# EAGLE board mLRS-tx-dualE28-base-v031-np (EAGLE 7.5.0)
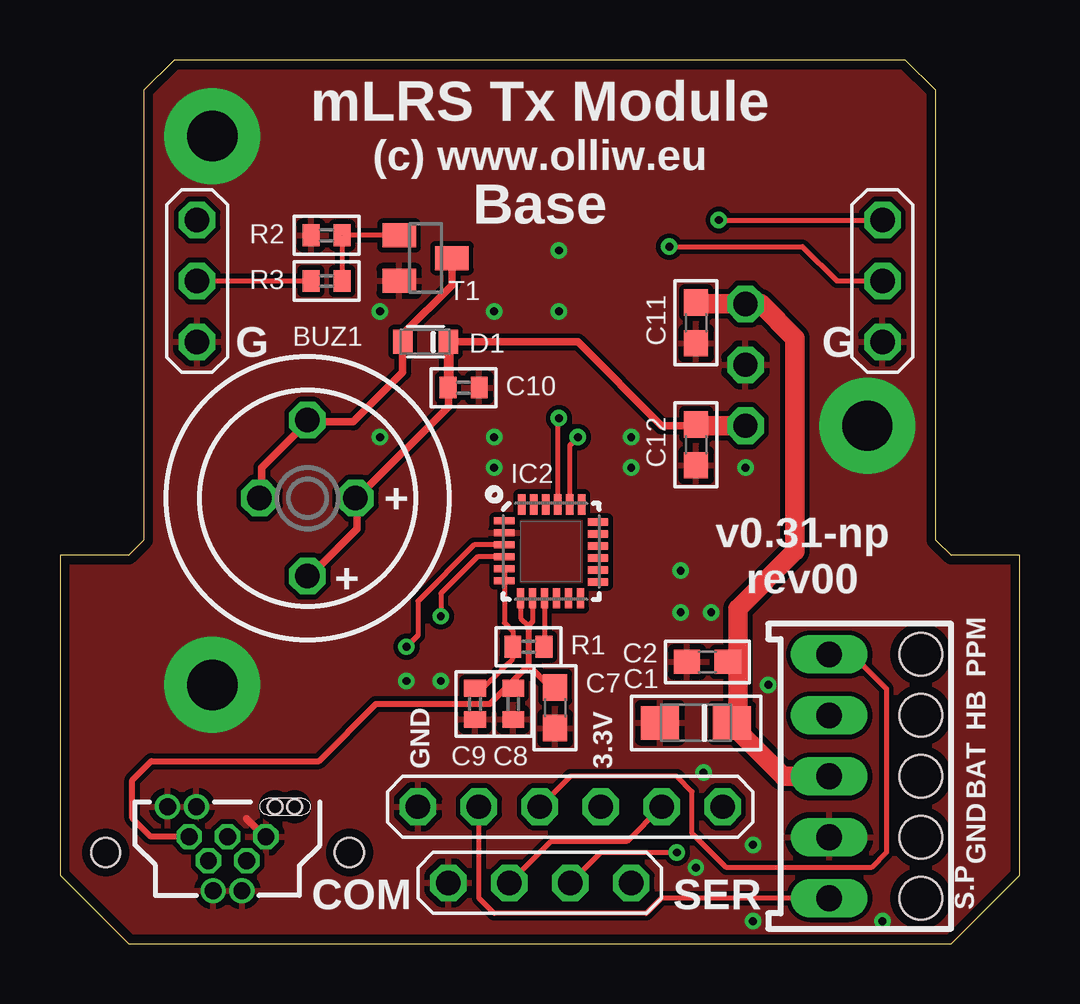
[diagram p0: board, top side]
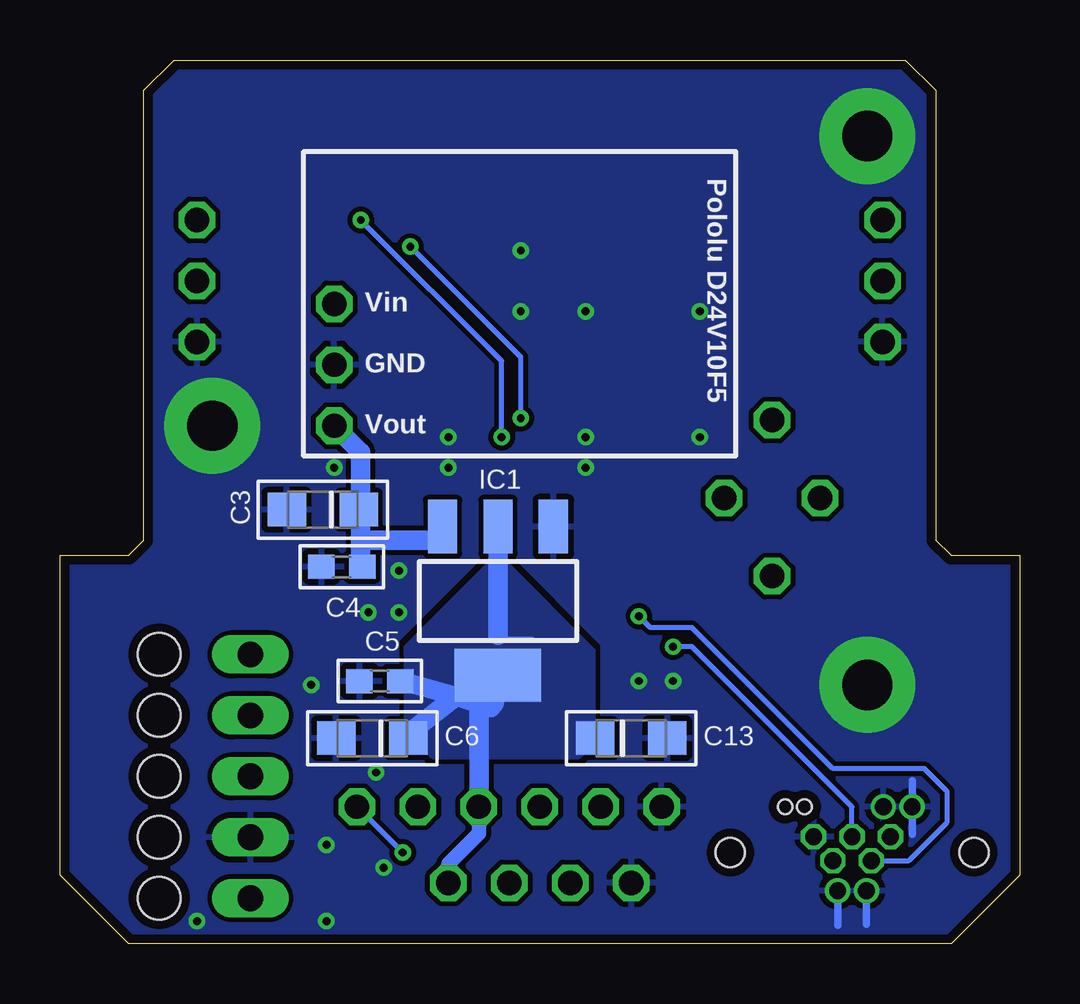
[diagram p1: board, bottom side, seen from below]

Size 40.01 x 36.83 mm. Coordinates in mm from the lower left corner, seen from the top.
Outline: 2.86,0 37.15,0 40.01,2.86 40.01,16.19 37.15,16.19 36.51,16.83 36.51,35.56 35.24,36.83 4.76,36.83 3.49,35.56 3.49,16.83 2.86,16.19 0,16.19 0,2.86 2.86,0
Copper layers (1*16): Top 0.0356mm / dielectric 1.5011mm / Bottom 0.0356mm
Design rules "ow-oshpark-2layer": minimum track width 6mil, minimum drill 13mil, track to track 6mil, track to pad 6mil, pad to pad 6mil, via to via 6mil, smd to smd 6mil, copper to edge 15mil, drill to drill 6mil, minimum pad ring 7mil, minimum via ring 7mil, stop-mask expansion 2.5mil, vias tented up to drill 26mil, thermal gap 10mil
Holes 0.6 mm at 8.97,5.71 9.78,5.71
Holes 1.2 mm at 1.91,3.81 12.06,3.81

## Footprints (pad centres in the part's own frame; a part is rotated, then mirrored left to right if it is on the bottom)
BUZZER-12MM = drill 1.016 octagon: + 3.25,0; - -3.25,0
BUZZER-9MM = drill 1.016 octagon: + 2,0; - -2,0
SMC_A = smd 1.6 x 1.4: + -1.5,0; - 1.5,0
C0603 = smd 1.1 x 1: 1 -0.85,0; 2 0.85,0
C0402 = smd 0.7 x 0.9: 1 -0.65,0; 2 0.65,0
SOD110-R = smd 0.8 x 1: A 0.95,0; C -0.95,0
SOT223 = smd 1.219 x 2.235: 1 -2.311,-3.099; 2 0,-3.099; 3 2.311,-3.099 | smd 3.6 x 2.2: 4 0,3.099
QFN24-CP2102N = smd 0.85 x 0.3: 1 -1.95,1.275; 2 -1.95,0.775; 3 -1.95,0.275; 4 -1.95,-0.225; 5 -1.95,-0.725; 6 -1.95,-1.225; 13 1.95,-1.275; 14 1.95,-0.775; 15 1.95,-0.275; 16 1.95,0.225; 17 1.95,0.725; 18 1.95,1.225 | smd 0.3 x 0.85: 7 -1.275,-1.95; 8 -0.775,-1.95; 9 -0.275,-1.95; 10 0.225,-1.95; 11 0.725,-1.95; 12 1.225,-1.95; 19 1.275,1.95; 20 0.775,1.95; 21 0.275,1.95; 22 -0.225,1.95; 23 -0.725,1.95; 24 -1.225,1.95
4455-B05 = drill 1.067 long: 1 -5.08,0; 2 -2.54,0; 3 0,0; 4 2.54,0; 5 5.08,0 | hole 1.778: -5.08,3.81; -2.54,3.81; 0,3.81; 2.54,3.81; 5.08,3.81
PINHEAD_6X1 = drill 1.016 octagon: 1 0,12.7; 2 0,10.16; 3 0,7.62; 4 0,5.08; 5 0,2.54; 6 0,0
PINHEAD_3X1 = drill 1.016 octagon: 1 0,0; 2 0,-2.54; 3 0,-5.08
PINHEAD_4X1 = drill 1.016 octagon: 1 0,7.62; 2 0,5.08; 3 0,2.54; 4 0,0
PINHEAD_3X1_WO = drill 1.016 octagon: 1 0,0; 2 0,-2.54; 3 0,-5.08
R0402 = smd 0.7 x 0.9: 1 -0.65,0; 2 0.65,0
SOT23 = smd 1 x 1.4: 1 -0.95,-1.1; 2 0.95,-1.1; 3 0,1.1
USB-MICROB-UP-NONPLATED = drill 0.7 pad 1: CASE$1 1.75,0.6; CASE$2 1.75,-0.6; CASE$3 -1.75,-1.3; CASE$4 -1.75,-2.5 | drill 0.7 pad 1 octagon: D+ -0.5,0; D- 0.5,-0.8; GND -0.5,1.6; ID 0.5,0.8; VBUS -0.5,-1.6

## Placement (x,y rotation side)
BUZ1  BUZZER-12MM  [BUZZER-12MM]  10.32,18.57 270 top
BUZ2  BUZZER-9MM-9MM  [BUZZER-9MM]  10.32,18.57 0 top
C1  10u  [SMC_A]  26.51,9.21 180 top
C2  100n  [C0603]  26.99,11.75 180 top
C3  10u  [SMC_A]  29.05,18.1 180 bottom
C4  100n  [C0603]  28.26,15.72 180 bottom
C5  100n  [C0603]  26.67,10.95 180 bottom
C6  10u  [SMC_A]  26.99,8.57 180 bottom
C7  4.7u  [C0603]  20.64,9.84 270 top
C8  100n  [C0402]  18.89,10 270 top
C9  100n  [C0402]  17.3,10 270 top
C10  100n  [C0402]  16.83,23.18 0 top
C11  100n  [C0603]  26.51,25.88 270 top
C12  100n  [C0603]  26.51,20.8 270 top
C13  10u  [SMC_A]  16.19,8.57 0 bottom
D1  BAT54J  [SOD110-R]  15.24,25.08 180 top
IC1  NCP1117ST33  [SOT223]  21.75,14.29 180 bottom
IC2  CP2102N-QFN24  [QFN24-CP2102N]  20.48,16.35 0 top
JP1  Molex K254 A-4455-BH05x  [4455-B05]  32.07,6.99 270 top
PH-CON  PINHEAD_6X1  [PINHEAD_6X1]  14.92,5.71 270 top
PH-CON2  PINHEAD_3X1WITHBORDER  [PINHEAD_3X1]  5.71,30.16 0 top
PH-CON3  PINHEAD_3X1WITHBORDER  [PINHEAD_3X1]  34.29,30.16 0 top
PH-SER  PINHEAD_4X1  [PINHEAD_4X1]  16.19,2.54 270 top
POLOLU-D24V10F5  PINHEAD_3X1WITHOUT  [PINHEAD_3X1_WO]  28.57,26.67 0 top
R1  1k  [R0402]  19.53,12.38 0 top
R2  10k  [R0402]  11.11,29.53 0 top
R3  10k  [R0402]  11.11,27.62 0 top
T1  FET-NSOT23  [SOT23]  15.24,28.57 270 top
U$1  USB-MICROB-UP-NONPLATED  [USB-MICROB-UP-NONPLATED]  6.99,3.97 270 top

## Library data of the parts
BUZ1 BUZ2 IC2 PH-CON PH-CON2 PH-CON3 PH-SER POLOLU-D24V10F5 T1 U$1 = # stdlib
C1-C13 R1-R3 = rcl
D1 = diode
IC1 = # SparkFun2
JP1 = con-molex-kk

## Nets
3.3V: C5.1 C6.+ C13.+ IC1.2 IC1.4 PH-CON.3 PH-SER.1
3.3V-CP2102: C9.1 IC2.5 IC2.6 R1.1
+5V: BUZ1.+ BUZ2.+ C3.+ C4.1 C10.1 C12.1 D1.C IC1.3 POLOLU-D24V10F5.3
BUZ-: BUZ1.- BUZ2.- D1.A T1.3
BUZZER: PH-CON2.2 R3.1
GND: C1.- C2.2 C3.- C4.2 C5.2 C6.- C7.2 C8.2 C9.2 C10.2 C11.2 C12.2 C13.- IC1.1 IC2.2 JP1.4 PH-CON2.3 PH-CON3.3 PH-CON.6 PH-SER.4 POLOLU-D24V10F5.2 R2.1 T1.2 U$1.CASE$1 U$1.CASE$2 U$1.CASE$3 U$1.CASE$4 U$1.GND
HEARTBEAT: JP1.2
JRPIN1_UART5_RX: JP1.1 PH-CON.4
JRPIN5_UART2_RX: JP1.5 PH-CON.5
N$1: IC2.4 U$1.D-
N$2: R2.2 R3.2 T1.1
N$3: IC2.3 U$1.D+
N$21: IC2.9 R1.2
UART4_RX: PH-CON.2 PH-SER.3
UART4_TX: PH-CON.1 PH-SER.2
USB_UART1_RX: IC2.21 PH-CON3.2
USB_UART1_TX: IC2.20 PH-CON3.1
VCC: C1.+ C2.1 C11.1 JP1.3 POLOLU-D24V10F5.1
VUSB: C7.1 C8.1 IC2.7 IC2.8 U$1.VBUS

## Tracks (layer width: path | path; a pad name or v marks a point on that pad's centre or on a via)
3.3V
  Bottom 0.203: 20.32,12.7 21.75,12.7 21.75,12.86
  Bottom 0.61: PH-CON.3 22.54,4.6 23.81,3.33 PH-SER.1
  Bottom 0.813: 21.75,12.86 IC1.2 | C6.+ 25.72,8.57 23.49,10.32 | 23.49,10.32 25.72,10.95 C5.1 | 23.49,10.32 22.07,9.84 21.91,10 IC1.4 22.54,10.55 PH-CON.3
  pour Bottom (no thermals): 18.41,7.78 24.45,7.78 25.56,9.05 25.56,12.38 22.07,15.88 21.43,15.88 17.78,12.22 17.78,8.41
3.3V-CP2102
  Top 0.203: C9.1 17.45,10.65 17.46,10.64 17.62,10.65 18.4,11.43 18.57,11.59 18.88,11.89 R1.1 18.89,12.4 18.89,13.02 18.53,13.38 IC2.6 IC2.5
+5V
  Top 0.203: C10.1 16.19,23.18
  Top 0.305: D1.C 21.59,25.08 25.08,21.59 26.57,21.59 C12.1 | 16.19,23.18 16.19,22.38 12.54,18.73 BUZ2.+ 12.38,18.51 12.38,17.3 10.4,15.32 BUZ1.+
  Top 0.406: D1.C 16.19,23.18
  Top 0.813: C12.1 26.51,21.59 26.57,21.59 POLOLU-D24V10F5.3
  Bottom 0.813: C4.1 27.46,15.88 27.46,16.83 | 27.46,16.83 27.46,18.1 | 27.46,18.1 27.46,20.48 POLOLU-D24V10F5.3 | C3.+ 27.46,18.1 | IC1.3 24.22,16.9 24.29,16.83 27.46,16.83
BUZ-
  Top 0.305: T1.3 16.34,27.45 14.29,25.4 14.29,24.77 | 14.29,24.77 D1.A | 14.29,24.77 14.29,23.81 12.22,21.75 10.55,21.75 | 10.55,21.75 BUZ1.- | 10.55,21.75 10.32,21.75 8.41,19.84 8.41,18.67 BUZ2.-
BUZZER
  Top 0.203: PH-CON2.2 R3.1
GND  (via drill 0.33, 2.1 pad 4)
  Top 0.305: 7.78,5.22 8.57,4.42
  Bottom 0.305: 4.48,6.8 4.48,4.58 | 6.38,2.25 6.38,0.82 | 7.57,2.21 7.57,0.77
  other vias: 33.66,21.59 6.35,33.66 26.51,3.17 6.35,10.79 34.29,0.95 28.89,0.95 29.53,10.79 28.89,4.13 23.81,19.84 23.81,21.11 18.1,19.84 18.1,21.11 28.57,19.84 18.1,26.35 20.8,26.35 20.8,28.89 13.34,26.35 14.45,10.95 26.83,7.14 25.88,13.81 25.88,15.56 27.15,13.81 13.34,21.11 15.88,10.95
  pour Bottom (isolate 0.203, rank 6): -0.64,37.15 40.64,37.15 40.64,-0.64 -0.64,-0.64
  pour Top (isolate 0.203, rank 6): -0.64,37.15 40.64,37.15 40.64,-0.64 -0.64,-0.64
JRPIN1_UART5_RX
  Top 0.203: JP1.1 33.02,12.06 34.45,10.64 34.45,3.81 33.81,3.17 27.78,3.17 26.35,4.6 26.35,6.35 25.72,6.99 21.27,6.99 PH-CON.4
JRPIN5_UART2_RX
  Top 0.203: JP1.5 25.08,1.91 24.45,1.27 18.1,1.27 17.46,1.91 PH-CON.5
N$1  (via drill 0.33)
  Top 0.203: IC2.4 17.4,16.13 15.88,14.61 v15.88,13.65
  Bottom 0.203: v15.88,13.65 15.4,13.18 13.65,13.18 7.78,7.3 3.97,7.3 3.02,6.35 3.02,5.08 4.63,3.47 U$1.D-
N$2  (1 unrouted)
  Top 0.203: T1.1 R2.2 R3.2
N$3  (via drill 0.33)
  Top 0.203: IC2.3 17.26,16.63 14.92,14.29 14.92,12.86 v14.45,12.38
  Bottom 0.203: v14.45,12.38 13.65,12.38 6.99,5.71 U$1.D+
N$21
  Top 0.203: 20.09,12.61 20.16,12.54 20.16,12.4 R1.2 20.2,12.41 IC2.9
UART4_RX
  Top 0.203: PH-SER.3 20.48,4.29 23.65,4.29 PH-CON.2
UART4_TX  (via drill 0.33)
  Top 0.203: PH-SER.2 22.54,3.81 v25.72,3.81
  Bottom 0.203: v25.72,3.81 PH-CON.1
USB_UART1_RX  (via drill 0.33)
  Top 0.203: IC2.21 20.75,21.71 v20.8,21.91 | v25.4,29.05 30.96,29.05 32.39,27.62 PH-CON3.2
  Bottom 0.203: v20.8,21.91 20.8,24.45 v25.4,29.05
USB_UART1_TX  (via drill 0.33)
  Top 0.203: IC2.20 21.25,20.78 v21.59,21.11 | v27.46,30.16 PH-CON3.1
  Bottom 0.203: v21.59,21.11 21.59,24.29 v27.46,30.16
VCC
  Top 0.203: 28.26,8.89 28.26,8.8 C1.+
  Top 0.406: C2.1 28.26,11.59
  Top 0.813: JP1.3 30.16,6.99 28.26,8.89 28.26,11.59 28.26,13.97 30.64,16.35 30.64,25.24 29.21,26.67 POLOLU-D24V10F5.1 26.73,26.67 C11.1
VUSB
  Top 0.203: 18.57,10.65 C8.1 18.89,10.97 | C7.1 20.28,10.85 | IC2.8 19.7,13.43 19.53,13.26 19.2,13.58 IC2.7
  Top 0.254: 19.53,13.26 19.53,11.6 | 18.57,10.65 17.92,10 13.18,10 10.79,7.62 3.81,7.62 3.02,6.83 3.02,5.24 3.79,4.47 U$1.VBUS | 18.89,10.97 19.53,11.6 | 20.28,10.85 19.53,11.6

## Text on the board
tNames: mLRS Tx Module | (c) www.olliw.eu | Base | G | G | + | v0.31-np / rev00 | + | PPM | HB | GND | 3.3V | BAT | GND | COM | SER | S.P
bNames: Pololu D24V10F5 | Vin | GND | Vout